# EAGLE board 5th SCHEMATIC_EP (EAGLE 9.6.2)
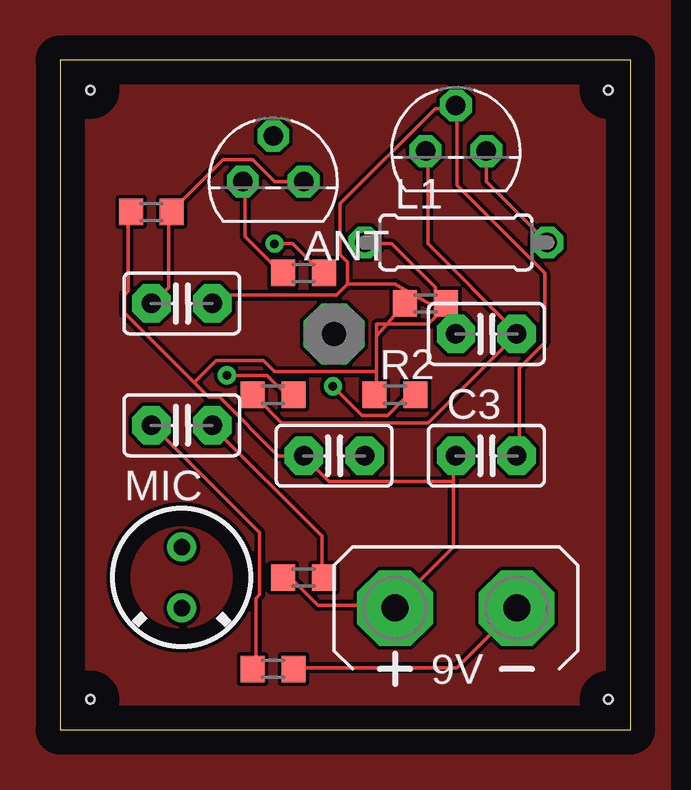
[diagram p0: board, top side]
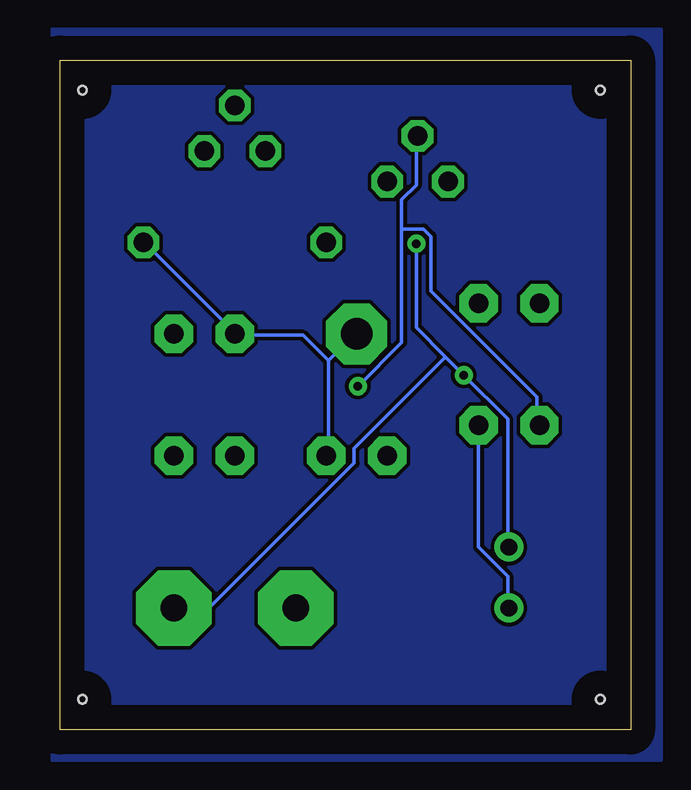
[diagram p1: board, bottom side, seen from below]

Size 23.8 x 27.93 mm. Coordinates in mm from the lower left corner, seen from the top.
Outline: 0,0 23.8,0 23.8,27.93 0,27.93 0,0
Copper layers (1*16): Top 0.035mm / dielectric 1.5mm / Bottom 0.035mm
Design rules "default": minimum track width 6mil, minimum drill 0.35mm, track to track 6mil, track to pad 6mil, pad to pad 6mil, via to via 6mil, smd to smd 6mil, copper to edge 40mil, drill to drill 6mil, minimum pad ring 10mil, minimum via ring 8mil, stop-mask expansion 4mil, vias tented up to drill 0mil, thermal gap 10mil
Holes 0.35 mm at 1.27,26.67 22.86,26.67 22.86,1.27 1.27,1.27

## Footprints (pad centres in the part's own frame; a part is rotated, then mirrored left to right if it is on the bottom)
AB9V = drill 1.118 pad 3.15 octagon: + 0,2.54; - 0,-2.54
PAD-01 = drill 1.321 pad 2.54 octagon: 1 0,0
C2.5-2 = drill 0.813 pad 1.6 octagon: 1 -1.27,0; 2 1.27,0
0207/7 = drill 0.813 octagon: 1 -3.81,0; 2 3.81,0
F6050AP = drill 0.7 pad 1.2: 1 0,1.27; 2 0,-1.27
R0603 = smd 1 x 1.1: 1 -0.85,0; 2 0.85,0
TO92 = drill 0.813 octagon: 1 1.27,0; 2 0,1.905; 3 -1.27,0

## Placement (x,y rotation side)
9V  AB9V  [AB9V]  16.51,5.08 90 top
ANT  10"  [PAD-01]  11.43,16.51 0 top
C1  0.1uF  [C2.5-2]  5.08,12.7 0 top
C2  0.1uF  [C2.5-2]  5.08,17.78 0 top
C3  0.01uF  [C2.5-2]  17.78,11.43 0 top
C4  20pF  [C2.5-2]  11.43,11.43 0 top
C5  4.7pF  [C2.5-2]  17.78,16.51 0 top
L1  0.1uH  [0207/7]  16.51,20.32 0 top
MIC  ELECTRET_MICROPHON-F6050AP  [F6050AP]  5.08,6.35 0 top
R1  10K  [R0603]  10.16,6.35 0 top
R2  1M  [R0603]  13.97,13.97 0 top
R3  10K  [R0603]  3.81,21.59 0 top
R4  10K  [R0603]  15.24,17.78 0 top
R5  100K  [R0603]  8.89,2.54 0 top
R6  100  [R0603]  10.16,19.05 0 top
R7  1K  [R0603]  8.89,13.97 0 top
T1  2N3904  [TO92]  8.89,22.86 0 top
T2  2N3904  [TO92]  16.51,24.13 0 top

## Library data of the parts
9V = battery
ANT = discrete
C1-C5 = capacitor-wima
L1 = rcl; SPICEPREFIX: L
MIC = microphon
R1-R7 = rcl; SPICEPREFIX: R
T1 T2 = transistor

## Nets
0: 9V.- MIC.1 R5.2 R6.2 R7.2
N$1: C1.1 R2.2 R5.1 T1.2
N$2: R6.1 T1.3
N$3: C2.1 R3.2 T1.1
N$4: 9V.+ C3.1 C4.1 L1.1 R1.1 R2.1 R3.1 R4.1
N$5: C1.2 MIC.2 R1.2
N$7: C5.2 R7.1 T2.3
N$8: C2.2 C3.2 R4.2 T2.2
N$9: ANT.1 C4.2 C5.1 L1.2 T2.1

## Tracks (layer width: path | path; a pad name or v marks a point on that pad's centre or on a via)
0  (via drill 0.35)
  Top 0.152: v6.96,14.78 8.64,14.78 9.4,14.02 9.7,14.02 R7.2 | v8.94,20.27 9.7,20.27 10.92,19.05 R6.2 | 9V.- 16.56,2.59 9.86,2.59 R5.2
  Bottom 0.152: MIC.1 5.13,7.62 5.13,12.95 v6.96,14.78 7.72,15.54 | v8.94,20.27 8.94,16.76 7.72,15.54 | 7.72,15.54 11.53,11.73 11.53,11.12 17.48,5.18 19,5.18 9V.-
GND
  pour Bottom: -1.27,29.21 -1.27,-1.27 24.13,-1.27 24.13,29.21
  pour Top: -2.54,30.48 -2.54,-2.54 25.4,-2.54 25.4,30.48
N$1  (via drill 0.35)
  Top 0.152: R5.1 8.18,2.59 8.18,5.49 8.33,5.64 8.33,8.23 3.91,12.65 C1.1 | v11.38,14.33 12.6,13.11 13.67,13.11 14.43,13.87 14.73,13.87 R2.2
  Bottom 0.152: v11.38,14.33 9.55,16.15 9.55,20.88 | 9.55,20.88 9.55,22.1 8.94,22.71 8.94,24.69 T1.2 | 9.55,20.88 8.64,20.88 8.33,20.57 8.33,18.29 3.91,13.87 3.91,12.8 C1.1
N$2
  Top 0.152: R6.1 9.25,19.05 7.72,20.57 7.72,22.86 T1.3
N$3
  Top 0.152: C2.1 3.91,17.83 4.52,18.44 4.52,21.49 R3.2 4.67,21.64 6.81,23.77 8.03,23.77 8.94,22.86 T1.1
N$4
  Top 0.152: 13.97,5.18 10.77,5.18 9.7,6.25 9.4,6.25 R1.1 | 16.41,10.36 16.41,7.62 13.97,5.18 | 16.41,10.36 16.41,11.43 C3.1 | 13.97,5.18 9V.+ | 13.21,16.41 13.21,16.92 15.34,16.92 15.65,17.22 15.65,18.44 13.82,20.27 12.75,20.27 L1.1 | 13.21,16.41 13.21,14.94 | 13.21,14.94 13.21,14.02 R2.1 | 13.21,16.41 R4.1 | 5.59,14.48 6.2,13.87 6.65,13.87 9.09,11.43 C4.1 11.23,10.36 16.41,10.36 | 5.59,14.48 2.69,17.37 2.69,18.14 2.85,18.29 2.85,21.49 R3.1 | 13.21,14.94 8.94,14.94 8.48,15.39 6.5,15.39 5.59,14.48
N$5
  Top 0.152: R1.2 10.92,6.4 10.92,8.08 6.35,12.65 C1.2
  Bottom 0.152: C1.2 6.35,7.62 5.13,6.4 5.13,5.18 MIC.2
N$7
  Top 0.152: R7.1 8.18,13.87 9.25,12.8 15.34,12.8 C5.2 19,16.61 15.34,20.27 15.34,24.08 T2.3
N$8
  Top 0.152: 11.99,18.59 13.97,18.59 15.38,17.78 R4.2 | 11.99,18.59 11.53,18.14 6.65,18.14 6.35,17.83 C2.2 | 11.99,18.59 11.99,19.51 11.68,19.81 11.68,21.95 15.65,25.91 16.41,25.91 T2.2 16.56,25.91 16.56,22.71 20.22,19.05 20.22,16.15 19.15,15.09 19.15,11.43 C3.2
N$9
  Top 0.152: T2.1 17.78,22.86 L1.2
  Bottom 0.152: 12.6,15.39 12.6,11.43 C4.2 | 12.6,15.39 11.53,16.46 ANT.1 | 12.6,15.39 13.67,16.46 16.41,16.46 C5.1 16.56,16.61 20.22,20.27 L1.2